# EAGLE board Piano 2 Octave Final  (EAGLE 7.6.0)

Size 73.58 x 63.39 mm. Coordinates in mm from the lower left corner, seen from the top.
Outline: 0,0 56.82,0 56.82,53.33 0,53.33 0,0
Copper layers (1*16): Top 0.035mm / dielectric 1.5mm / Bottom 0.035mm
Design rules "default": minimum track width 10mil, minimum drill 24mil, track to track 8mil, track to pad 8mil, pad to pad 8mil, via to via 8mil, smd to smd 8mil, copper to edge 40mil, drill to drill 8mil, minimum pad ring 10mil, minimum via ring 8mil, stop-mask expansion 4mil, vias tented up to drill 0mil, thermal gap 10mil

## Footprints (pad centres in the part's own frame; a part is rotated, then mirrored left to right if it is on the bottom)
LED5MM = drill 0.813 octagon: A -1.27,0; K 1.27,0
PIEZO-22MM = drill 1 pad 2.54: P$1 -5,0; P$2 5,0
0207/10 = drill 0.813 octagon: 1 -5.08,0; 2 5.08,0
B25V = drill 0.813 long: A 2.54,0.635; E -2.54,0.635; S 0,0.635
TL1105 = drill 1 pad 1.676: 1 -2.25,3.25; 2 2.25,3.25; 3 -2.25,-3.25; 4 2.25,-3.25
ARDUINO_UNO = drill 1.016 pad 1.88: 0 63.5,50.8; 1 60.96,50.8; 2 58.42,50.8; 3 55.88,50.8; 3.3V 35.56,2.54; 4 53.34,50.8; 5 50.8,50.8; 5V 38.1,2.54; 6 48.26,50.8; 7 45.72,50.8; 8 41.656,50.8; 9 39.116,50.8; 10 36.576,50.8; 11 34.036,50.8; 12 31.496,50.8; 13 28.956,50.8; A0 50.8,2.54; A1 53.34,2.54; A2 55.88,2.54; A3 58.42,2.54; A4 60.96,2.54; A5 63.5,2.54; AREF 23.876,50.8; GND 26.416,50.8; GND. 43.18,2.54; GND.. 40.64,2.54; I/OREF 30.48,2.54; N/C 27.94,2.54; RESET 33.02,2.54; SCL 18.796,50.8; SDA 21.336,50.8; VIN 45.72,2.54 | hole 3.2: 66.04,7.62; 66.04,35.56; 15.24,50.8; 13.97,2.54
1X16P-2.54-2.54-11.6-3.0-BLACK-MALE = drill 0.889 pad 1.651 square: 1 0,19.05 | drill 0.889 pad 1.651: 2 0,16.51; 3 0,13.97; 4 0,11.43; 5 0,8.89; 6 0,6.35; 7 0,3.81; 8 0,1.27; 9 0,-1.27; 10 0,-3.81; 11 0,-6.35; 12 0,-8.89; 13 0,-11.43; 14 0,-13.97; 15 0,-16.51; 16 0,-19.05

## Placement (x,y rotation side)
D1  [LED5MM]  5,784.78 0 top  (outside the outline)
D2  [LED5MM]  5,746.68 0 top  (outside the outline)
PIEZO1  [PIEZO-22MM]  5,22.78 0 top
R1  2k‎Ω  [0207/10]  5,619.68 0 top  (outside the outline)
R2  470‎Ω  [0207/10]  5,733.98 0 top  (outside the outline)
R3  470‎Ω  [0207/10]  5,479.98 0 top  (outside the outline)
R4  470‎Ω  [0207/10]  5,492.68 0 top  (outside the outline)
R5  200‎Ω  [0207/10]  5,632.38 0 top  (outside the outline)
R6  400‎Ω  [0207/10]  5,645.08 0 top  (outside the outline)
R7  800‎Ω  [0207/10]  5,657.78 0 top  (outside the outline)
R8  1600‎Ω  [0207/10]  5,670.48 0 top  (outside the outline)
R9  12800‎Ω  [0207/10]  5,225.98 0 top  (outside the outline)
R10  6400‎Ω  [0207/10]  5,238.68 0 top  (outside the outline)
R11  3200‎Ω  [0207/10]  5,251.38 0 top  (outside the outline)
R12  1600‎Ω  [0207/10]  5,264.08 0 top  (outside the outline)
R13  800‎Ω  [0207/10]  5,276.78 0 top  (outside the outline)
R14  400‎Ω  [0207/10]  5,289.48 0 top  (outside the outline)
R15  200‎Ω  [0207/10]  5,302.18 0 top  (outside the outline)
R16  2k‎Ω  [0207/10]  5,314.88 0 top  (outside the outline)
R17  3200‎Ω  [0207/10]  5,683.18 0 top  (outside the outline)
R18  6400‎Ω  [0207/10]  5,695.88 0 top  (outside the outline)
R19  12800‎Ω  [0207/10]  5,708.58 0 top  (outside the outline)
R20  25600‎Ω  [0207/10]  5,721.28 0 top  (outside the outline)
R21  1k‎Ω  [0207/10]  5,759.38 0 top  (outside the outline)
R22  12800‎Ω  [0207/10]  5,327.58 0 top  (outside the outline)
R23  6400‎Ω  [0207/10]  5,340.28 0 top  (outside the outline)
R24  3200‎Ω  [0207/10]  5,352.98 0 top  (outside the outline)
R25  1600‎Ω  [0207/10]  5,365.68 0 top  (outside the outline)
R26  800‎Ω  [0207/10]  5,378.38 0 top  (outside the outline)
R27  400‎Ω  [0207/10]  5,391.08 0 top  (outside the outline)
R28  200‎Ω  [0207/10]  5,403.78 0 top  (outside the outline)
R29  2k‎Ω  [0207/10]  5,454.58 0 top  (outside the outline)
R30  1k‎Ω  [0207/10]  5,772.08 0 top  (outside the outline)
R49  220‎Ω  [0207/10]  5,822.88 0 top  (outside the outline)
Rpot1  250k‎Ω  [B25V]  5,810.18 0 top  (outside the outline)
S1  [TL1105]  5,416.48 0 top  (outside the outline)
S2  [TL1105]  5,467.28 0 top  (outside the outline)
S3  [TL1105]  5,429.18 0 top  (outside the outline)
S4  [TL1105]  5,441.88 0 top  (outside the outline)
S5  [TL1105]  5,505.38 0 top  (outside the outline)
S6  [TL1105]  5,35.48 0 top
S7  [TL1105]  5,48.18 0 top
S8  [TL1105]  5,60.88 0 top
S9  [TL1105]  5,73.58 0 top  (outside the outline)
S10  [TL1105]  5,86.28 0 top  (outside the outline)
S11  [TL1105]  5,98.98 0 top  (outside the outline)
S12  [TL1105]  5,518.08 0 top  (outside the outline)
S13  [TL1105]  5,530.78 0 top  (outside the outline)
S14  [TL1105]  5,543.48 0 top  (outside the outline)
S15  [TL1105]  5,556.18 0 top  (outside the outline)
S16  [TL1105]  5,111.68 0 top  (outside the outline)
S17  [TL1105]  5,124.38 0 top  (outside the outline)
S18  [TL1105]  5,137.08 0 top  (outside the outline)
S19  [TL1105]  5,149.78 0 top  (outside the outline)
S20  [TL1105]  5,162.48 0 top  (outside the outline)
S21  [TL1105]  5,175.18 0 top  (outside the outline)
S22  [TL1105]  5,187.88 0 top  (outside the outline)
S23  [TL1105]  5,200.58 0 top  (outside the outline)
S24  [TL1105]  5,213.28 0 top  (outside the outline)
S25  [TL1105]  5,568.88 0 top  (outside the outline)
S26  [TL1105]  5,581.58 0 top  (outside the outline)
S27  [TL1105]  5,594.28 0 top  (outside the outline)
S28  [TL1105]  5,606.98 0 top  (outside the outline)
U1  [ARDUINO_UNO]  5,10.08 0 top
U3  [1X16P-2.54-2.54-11.6-3.0-BLACK-MALE]  5,797.48 0 top  (outside the outline)

## Library data of the parts
D1 D2 PIEZO1 R1-R30 R49 Rpot1 S1-S28 U1 U3 = AUTODESK_CIRCUITS_BREADBOARD

## Nets
N$1: R9.2 S11.3
N$2: S19.2
N$3: S19.1
N$4: R9.1 R10.2 S19.3
N$5: S18.2
N$6: S18.1
N$7: R10.1 R11.2 S18.3
N$8: S10.2
N$9: S10.1
N$10: R11.1 R12.2 S10.3
N$11: S9.2
N$12: S9.1
N$13: R12.1 R13.2 S9.3
N$14: S8.2
N$15: S8.1
N$16: R13.1 R14.2 S8.3
N$17: S7.2
N$18: S7.1
N$19: R14.1 R15.2 S7.3
N$20: R15.1 R16.2 S6.3 U1.A3
N$21: R28.1 R29.2 S4.3 U1.A4
N$22: R27.1 R28.2 S16.3
N$23: S17.2
N$24: S17.1
N$25: R26.1 R27.2 S17.3
N$26: S20.2
N$27: S20.1
N$28: R25.1 R26.2 S20.3
N$29: S21.2
N$30: S21.1
N$31: R24.1 R25.2 S21.3
N$32: S22.2
N$33: S22.1
N$34: R23.1 R24.2 S22.3
N$35: S23.2
N$36: S23.1
N$37: R22.1 R23.2 S23.3
N$38: S24.1
N$39: R22.2 S24.3
N$40: R3.1 S2.1 U1.3
N$41: R2.1 S1.1 U1.4
N$42: S2.2
N$43: S2.3
N$44: S3.3
N$45: PIEZO1.P$1 U1.8
N$46: S6.4 S7.4 S8.4 S9.4 S10.4 S11.4 S18.4 S19.4
N$47: S4.4 S16.4 S17.4 S20.4 S21.4 S22.4 S23.4 S24.4
N$48: S5.4 S12.4 S13.4 S14.4 S15.4 S25.4 S26.4 S27.4 S28.4
N$49: S5.2
N$50: S5.1
N$51: R1.2 R5.1 S5.3 U1.A5
N$52: S12.2
N$53: S12.1
N$54: R5.2 R6.1 S12.3
N$55: S13.2
N$56: S13.1
N$57: R6.2 R7.1 S13.3
N$58: S14.2
N$59: S14.1
N$60: R7.2 R8.1 S14.3
N$61: S15.2
N$62: S15.1
N$63: R8.2 R17.1 S15.3
N$64: S25.2
N$65: S25.1
N$66: R17.2 R18.1 S25.3
N$67: S26.2
N$68: S26.1
N$69: R18.2 R19.1 S26.3
N$70: S27.2
N$71: S27.1
N$72: R19.2 R20.1 S27.3
N$73: S28.1
N$74: R20.2 S28.3
N$75: R4.1 S3.1 U1.2
N$76: R1.1 R2.2 R3.2 R4.2 R16.1 R29.1 R49.1 Rpot1.A U1.5V U3.2
N$77: S3.2
N$78: PIEZO1.P$2 R21.1 R30.1 Rpot1.E S1.4 S2.4 S3.4 S11.2 S24.2 S28.2 U1.GND.. U3.1 U3.5 U3.16
N$79: D2.K R21.2
N$80: D1.K R30.2
N$81: D1.A U1.5
N$82: D2.A U1.6
N$83: S6.2
N$84: S6.1
N$85: S1.2
N$86: S1.3
N$87: U1.12 U3.4
N$88: U1.11 U3.6
N$89: U1.10 U3.11
N$90: U1.13 U3.13
N$91: U1.7 U3.14
N$92: Rpot1.S U3.3
N$93: R49.2 U3.15
N$94: U1.9 U3.12
N$95: S4.2
N$96: S4.1
N$97: S16.2
N$98: S16.1
N$99: S11.1

## Tracks (layer width: path | path; a pad name or v marks a point on that pad's centre or on a via)
N$1  (1 unrouted)
N$4  (2 unrouted)
N$7  (2 unrouted)
N$10  (2 unrouted)
N$13  (2 unrouted)
N$16  (2 unrouted)
N$19  (2 unrouted)
N$20  (3 unrouted)
N$21  (3 unrouted)
N$22  (2 unrouted)
N$25  (2 unrouted)
N$28  (2 unrouted)
N$31  (2 unrouted)
N$34  (2 unrouted)
N$37  (2 unrouted)
N$39  (1 unrouted)
N$40  (2 unrouted)
N$41  (2 unrouted)
N$45  (1 unrouted)
N$46  (7 unrouted)
N$47  (7 unrouted)
N$48  (8 unrouted)
N$51  (3 unrouted)
N$54  (2 unrouted)
N$57  (2 unrouted)
N$60  (2 unrouted)
N$63  (2 unrouted)
N$66  (2 unrouted)
N$69  (2 unrouted)
N$72  (2 unrouted)
N$74  (1 unrouted)
N$75  (2 unrouted)
N$76  (9 unrouted)
N$78  (13 unrouted)
N$79  (1 unrouted)
N$80  (1 unrouted)
N$81  (1 unrouted)
N$82  (1 unrouted)
N$87  (1 unrouted)
N$88  (1 unrouted)
N$89  (1 unrouted)
N$90  (1 unrouted)
N$91  (1 unrouted)
N$92  (1 unrouted)
N$93  (1 unrouted)
N$94  (1 unrouted)